# Altium PCB FinalSubNode.PcbDoc
Units mm, origin at the board's own origin, x right, y up, seen from the top; angles counter-clockwise.
Board outline 106.68 x 41.15 mm, 2 copper layers (Top Layer, Bottom Layer); 10 components, 12 nets, 66 pads, 0 vias.
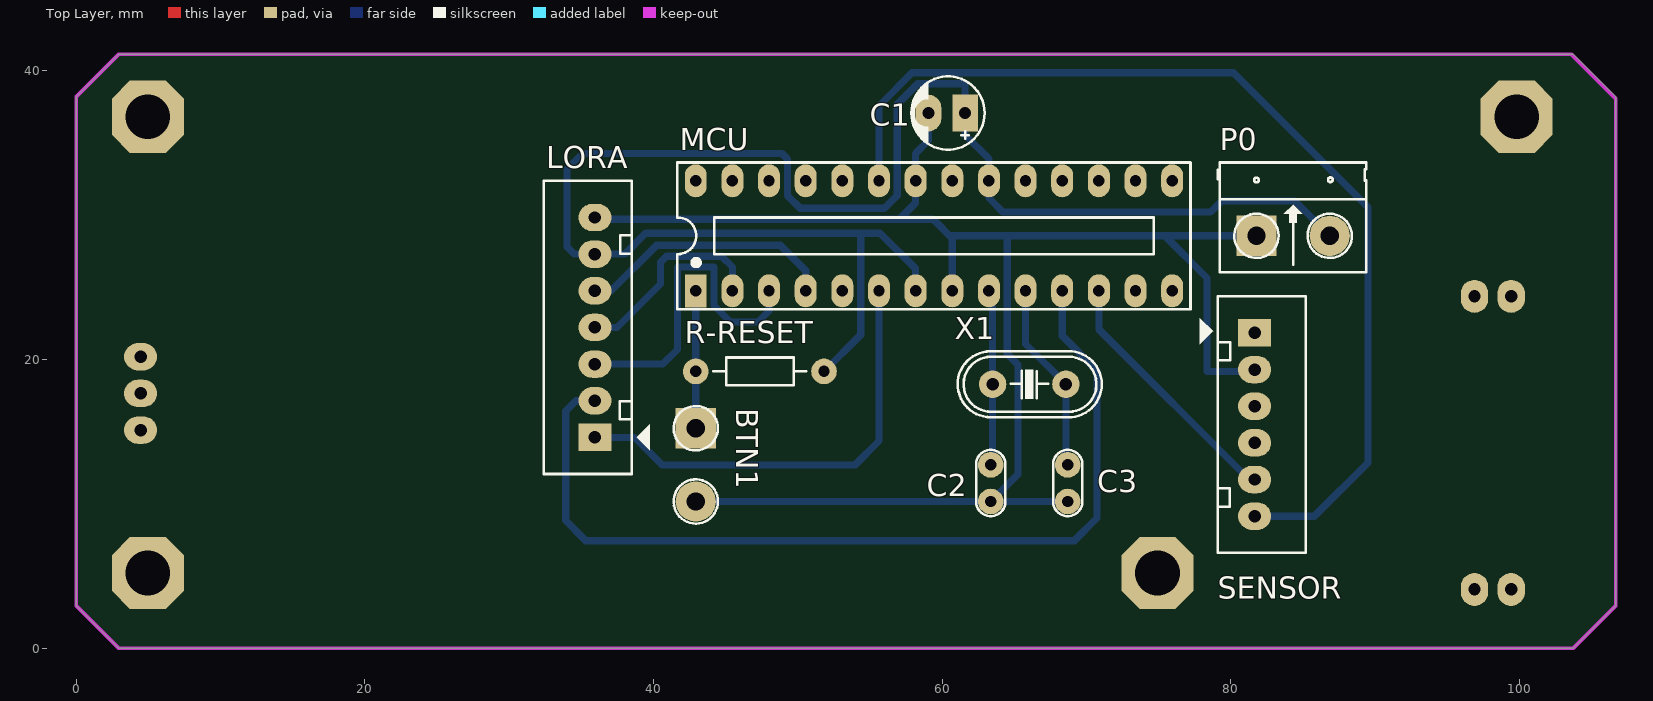
[diagram p0: Top Layer view]
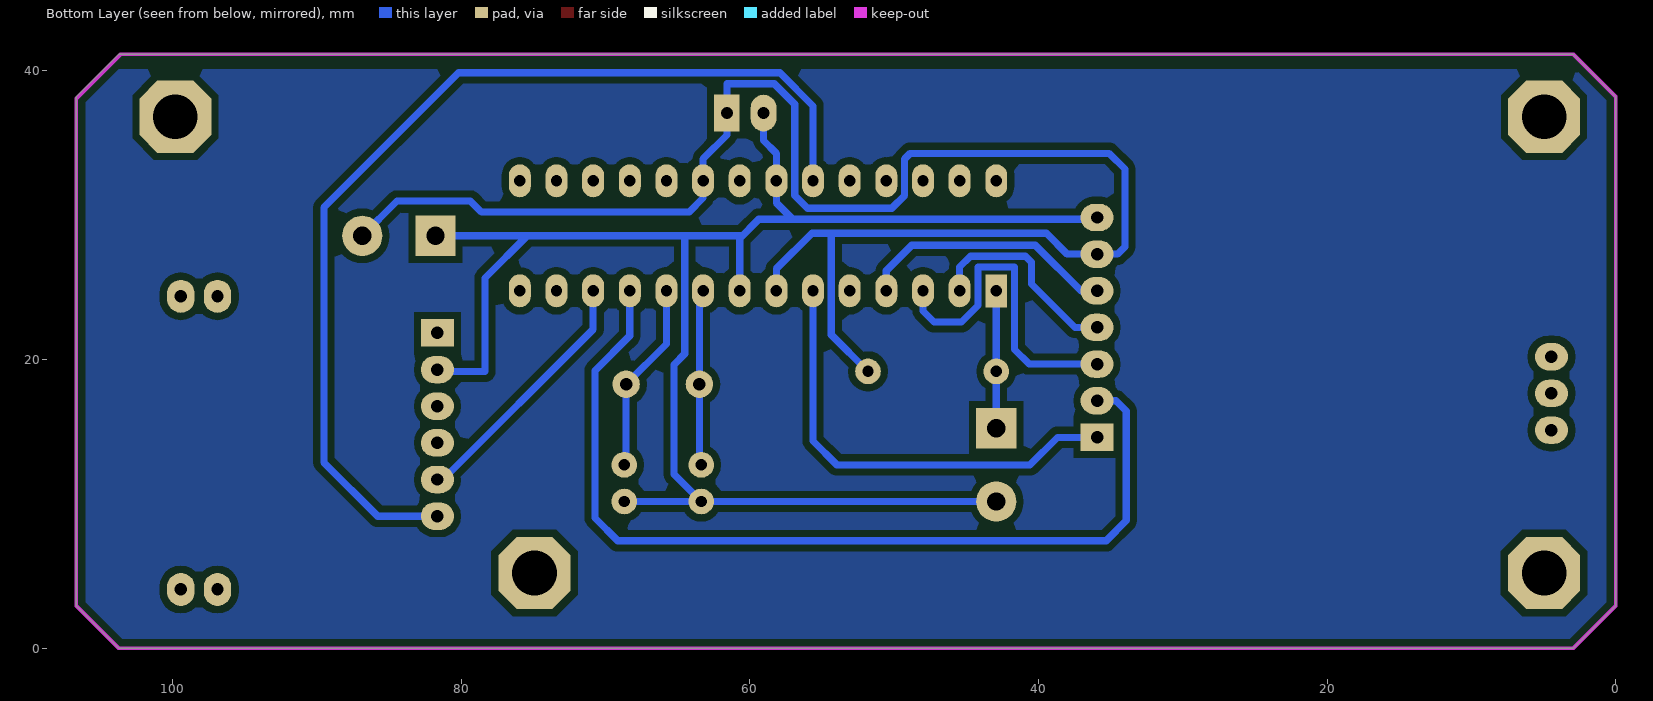
[diagram p1: Bottom Layer view, seen from below]
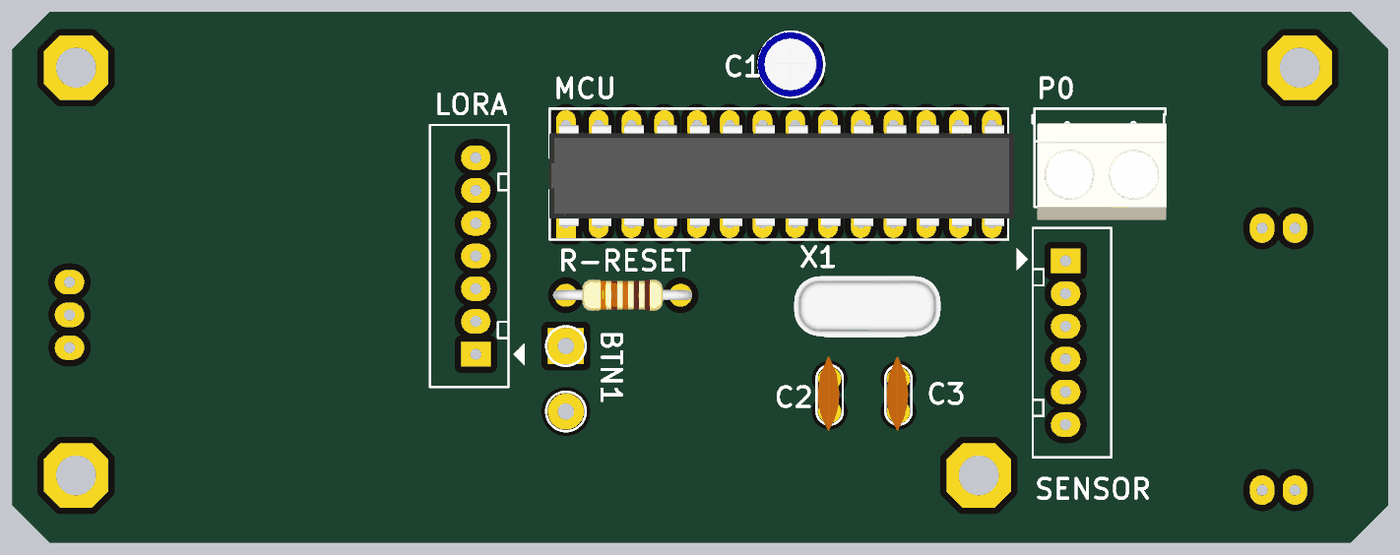
[diagram p2: 3D render of the assembled board from above, using the file's embedded part models]

## Layer stack, top to bottom
Top Solder: solder mask 0.0102, Solder Resist, Dk 3.5
Top Layer: signal copper 0.0356
Dielectric 1: dielectric 0.32, FR-4, Dk 4.8
Bottom Layer: signal copper 0.0356
Bottom Solder: solder mask 0.0102, Solder Resist, Dk 3.5

## Board outline
0,2.921 2.921,0 103.759,0 106.68,2.921 106.68,38.227 103.759,41.148 2.921,41.148 0,38.227

## Design rules (kind name [scope] priority, off if disabled: settings)
Clearance [All] p1: gap=0.254 except(0.5: Arc-Poly Track-Poly SMDPad-Poly THPad-Poly Via-Poly Fill-Poly Poly-Poly Poly-Region Poly-Text)
DiffPairsRouting [All] p1: maxlimit=0.5 minlimit=0.5 mostfreqgap=0.5 toplayer_minwidth=0.5 toplayer_maxwidth=0.5 toplayer_prefwidth=0.5 bottomlayer_minwidth=0.5 bottomlayer_maxwidth=0.5 bottomlayer_prefwidth=0.5 maxuncoupledlength=12.7
MinimumSolderMaskSliver [All] p1: minsoldermaskwidth=0.5
PlaneConnect [All] p1: planeconnectstyle=Relief reliefexpansion=0.5 reliefentries=4 reliefconductorwidth=0.5 reliefairgap=0.5
PolygonConnect [All] p1: connectstyle=Relief reliefconductorwidth=0.5 reliefentries=4 polygonreliefangle="90 Angle" airgapwidth=0.5
RoutingLayers [All] p1: top layer_v5=FALSE bottom layer_v5=TRUE
RoutingVias [All] p1: holewidth=0.711 width=1.27 viastyle="Through Hole" minholewidth=0.6 minwidth=1.2 maxholewidth=5 maxwidth=5
SolderMaskExpansion [All] p1: expansion=0.5
Width [All] p1: maxlimit=2 minlimit=0.254 preferedwidth=0.5
26 further rules are at their usual default settings.

## Classes and differential pairs
component class SubNodeMainBoard: C1 C2 C3 LORA MCU P0 R-RESET SENSOR X1

## Components (designator, comment, footprint, x,y, rotation, side; value= is the part's Value field where it differs from the comment)
BTN1 "Reset button" HED2 42.926,15.24 r270 top
C1 "10uF" CP1/2 61.595,37.084 r180 top
C2 "22pF" CN1 63.373,10.16 r90 top
C3 "22pF" CN1 68.707,10.16 r90 top
LORA "LORA" CON7 35.941,14.605 r90 top (schematic designator JP0)
MCU "ATmega32P8-PU" DIP28/W0.3 42.926,24.765 r0 top
P0 "Power Source" HED2 81.788,28.575 r0 top
R-RESET "10k" R1/4W 42.926,19.177 r0 top
SENSOR "SENSOR" CON6 81.661,21.844 r270 top (schematic designator JP1)
X1 "16 MHz" XT2 66.04,18.288 r180 top

## Footprints (in the part's own frame and the unit in brackets; to place one, negate y for a bottom-side part, rotate by r counter-clockwise, add the part's x,y. Pads: shape width x height; smd on the part's side, far side on the other; paste and mask are expansions set on the pad)
CN1 [mil]
  round 70 hole 31: 1(0,0) 2(100,0)
  silkscreen extent -40,-40 141,40, body extent -60,-30 170,37, height 265
CON6 [mil] "CON6"
  rect 75x90 hole 34: 1(0,0)
  oval 75x90 hole 34: 2(100,0) 3(200,0) 4(300,0) 5(400,0) 6(500,0)
  silkscreen extent -100,-150 600,140
CON7 [mil] "CON7"
  rect 75x90 hole 34: 1(0,0)
  oval 75x90 hole 34: 2(100,0) 3(200,0) 4(300,0) 5(400,0) 6(500,0) 7(600,0)
  silkscreen extent -100,-150 700,140
CP1/2 [mil] "Tu hoa < 22uF/16>50V"
  rect 70x100 hole 32: 1(0,0)
  oval 70x100 hole 32: 2(100,0)
  silkscreen extent -53,-100 147,100, body extent -49,-99 149,99, height 287
DIP28/W0.3 [mil] "28 PIN, W 300mil, Pin to pin 100mil"
  rect 60x90 hole 31: 1(0,0)
  oval 60x90 hole 31: 2(100,0) 3(200,0) 4(300,0) 5(400,0) 6(500,0) 7(600,0) 8(700,0) 9(800,0) 10(900,0) 11(1000,0) 12(1100,0) 13(1200,0) 14(1300,0) 15(1300,300) 16(1200,300) 17(1100,300) 18(1000,300) 19(900,300) 20(800,300) 21(700,300) 22(600,300) 23(500,300) 24(400,300) 25(300,300) 26(200,300) 27(100,300) 28(0,300)
  silkscreen extent -50,-50 1350,350, body extent -50,-10 1367,300, height 200
HED2 [mil] "Header 2, 2 pin, hight 300mil, Pin to Pin 200, Colour Green"
  rect 110x110 hole 50: 1(0,0)
  round 110 hole 50: 2(200,0)
  silkscreen extent -60,-60 260,60
R1/4W [mil] "R 1/4W, 2 Pin, 350mil"
  round 70 hole 31: 1(0,0) 2(350,0)
  silkscreen extent 48,-38 302,38, body extent -40,-47 386,47, height 111
XT2 [mil] "Footpin for Crystal 2 pin"
  round 75 hole 34: 1(-100,0) 2(100,0)
  silkscreen extent -198,-90 195,90, body extent -233,-93 213,90, height 138

## Part data
BTN1 P0: library part Hed2, "Header 2 (Green)"
C1: library part CP1, "Cap P  0,1uF < 22uF , 16 - 50V"
C2 C3: library part CN1, "Cap np  1pF - 472pF"
LORA: library part Con7, "Connector 7"
MCU: library part ATmega8-L, "8-Bit AVR Microcontroller with 8K Bytes of In-System Programmable Flash Memory"
R-RESET: library part R1/4W, "Resistor 1/4W"
SENSOR: library part Con6, "Connector 6"
X1: library part XT2, "Crystal For all Crystal 2pin."

## Free pads (board coordinates)
  oct 5x5 hole 3.1 mask+0.5: 1(4.953,5.207) 1(4.953,36.83) 1(74.93,5.207) 1(99.822,36.83)
  oval 1.905x2.286 hole 0.864 mask+0.5: FIX(96.901,4.064) FIX(96.901,24.384) FIX(99.441,4.064) FIX(99.441,24.384)
  oval 2.286x1.905 hole 0.864: ""(4.445,15.113) ""(4.445,17.653) ""(4.445,20.193)

## Nets (pads, with @x,y where several pads share a name; then routed paths per layer and width w, separated by ;. In a path a pad name is that pad's centre, name@x,y a point inside that pad or via, vN(x,y) a via of type N, cw(c..) or ccw(c..) an arc to the next point about the centre after c; other vN are vias at no path point)
5V: C1.1 LORA.6 MCU.7 MCU.20 P0.2 R-RESET.2 | length 115.9
  Bottom Layer w0.5: R-RESET.2 54.356,21.717 54.356,28.753 ; MCU.7 58.166,26.289 55.702,28.753 39.446,28.753 37.998,27.305 LORA.6 34.519,27.305 34.011,27.813 34.011,33.198 35.103,34.29 48.895,34.29 49.276,33.909 49.276,31.369 50.165,30.48 56.007,30.48 56.896,31.369 56.896,37.694 58.318,39.116 61.595,39.116 C1.1 61.595,35.56 63.246,33.909 MCU.20 63.246,31.191 64.211,30.226 78.613,30.226 79.375,30.988 84.455,30.988 P0.2
A0: MCU.23 SENSOR.6 | length 71
  Bottom Layer w0.5: MCU.23 55.626,37.58 57.916,39.87 80.196,39.87 89.529,30.536 89.529,12.872 85.801,9.144 SENSOR.6
D2-AUX: LORA.5 MCU.4 | length 18
  Bottom Layer w0.5: LORA.5 37.06,24.765 40.215,27.92 48.788,27.92 50.546,26.162 MCU.4
D4-M0: LORA.1 MCU.6 | length 31.6
  Bottom Layer w0.5: LORA.1 38.681,14.605 40.586,12.7 53.975,12.7 55.626,14.351 MCU.6
D5-M1: LORA.2 MCU.11 | length 64.7
  Bottom Layer w0.5: LORA.2 34.62,17.145 33.909,16.434 33.909,8.839 35.306,7.442 69.164,7.442 70.739,9.017 70.739,19.228 68.326,21.641 MCU.11
D6-ENABLE: MCU.12 SENSOR.5 | length 17.8
  Bottom Layer w0.5: MCU.12 70.866,22.098 81.28,11.684 SENSOR.5
GND: BTN1.2 C1.2 C2.1 C3.1 LORA.7 MCU.8 MCU.22 P0.1 SENSOR.2 | length 125.7
  Bottom Layer w0.5: LORA.7 36.06,29.726 57.031,29.726 ; BTN1.2 C2.1 ; C1.2 59.055,35.179 58.166,34.29 MCU.22 58.166,30.861 57.023,29.718 59.385,29.718 60.706,28.397 ; MCU.8 60.706,28.575 67.31,28.575 ; 64.516,28.448 64.516,20.396 65.253,19.66 65.253,12.04 C2.1 ; C3.1 C2.1 ; SENSOR.2 81.534,19.177 78.359,19.177 78.359,25.654 75.438,28.575 67.31,28.575 ; P0.1 67.31,28.575
NetBTN1_1: BTN1.1 MCU.1 R-RESET.1 | length 9.5
  Bottom Layer w0.5: BTN1.1 R-RESET.1 MCU.1
NetC2_2: C2.2 MCU.9 X1.2 | length 12.2
  Bottom Layer w0.5: MCU.9 63.5,24.511 X1.2 63.5,12.827 C2.2
NetC3_2: C3.2 MCU.10 X1.1 | length 13.3
  Bottom Layer w0.5: MCU.10 65.786,21.082 X1.1 68.58,12.827 C3.2
RXD-TX_LORA: LORA.4 MCU.2 | length 14.4
  Bottom Layer w0.5: LORA.4 37.473,22.225 40.483,25.235 40.483,26.743 40.906,27.166 44.712,27.166 45.466,26.412 MCU.2
TXD-RX_LORA: LORA.3 MCU.3 | length 23
  Bottom Layer w0.5: LORA.3 40.644,19.685 41.66,20.701 41.66,26.412 44.192,26.412 44.192,23.749 45.335,22.606 47.244,22.606 48.006,23.368 MCU.3
pads on no net: MCU.5 MCU.13 MCU.14 MCU.15 MCU.16 MCU.17 MCU.18 MCU.19 MCU.21 MCU.24 MCU.25 MCU.26 MCU.27 MCU.28 SENSOR.1 SENSOR.3 SENSOR.4

## Polygon pours and split planes (outlines as drawn)
no net on Bottom Layer "TOP" (solid, pour order 2): 2.921,0 0,2.921 0,38.227 1.905,40.132 104.775,40.132 106.68,38.227 106.68,2.921 103.759,0

## Keep-outs
Keep-Out Layer:
  lines w0.254: 0,2.921 0,38.227 2.921,41.148 103.632,41.148 106.68,38.1 106.68,2.921 103.759,0 2.921,0 0,2.921